# Altium PCB PCB1.PcbDoc
Units mm, origin at the board's own origin, x right, y up, seen from the top; angles counter-clockwise.
Board outline 64.01 x 64.26 mm, 2 copper layers (Top Layer, Bottom Layer); 22 components, 36 nets, 127 pads, 2 vias.
Unrouted connection lines stored in the file: 5.
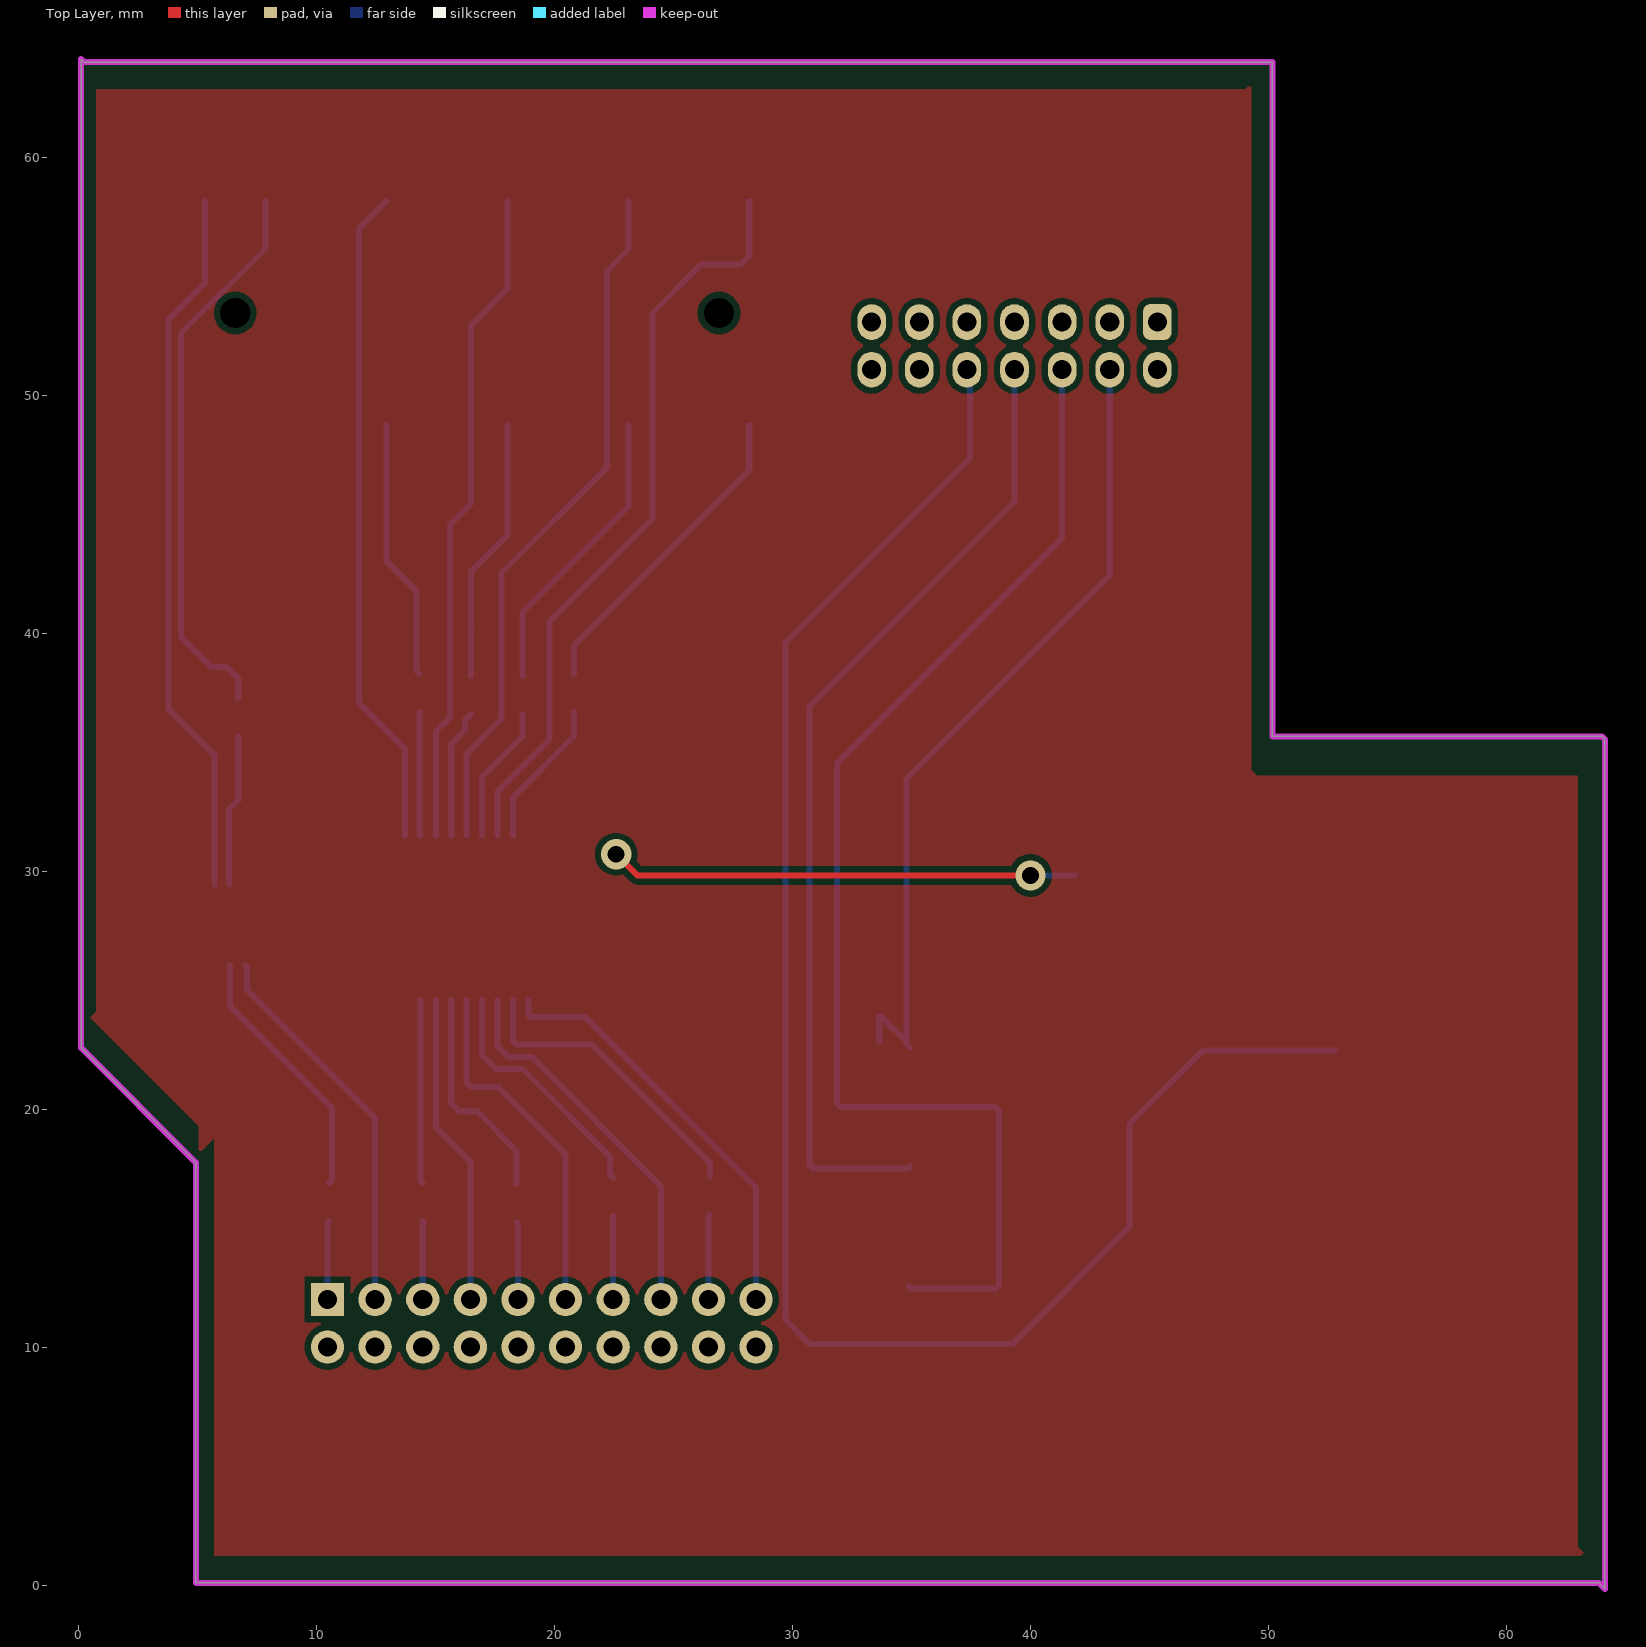
[diagram p0: Top Layer view]
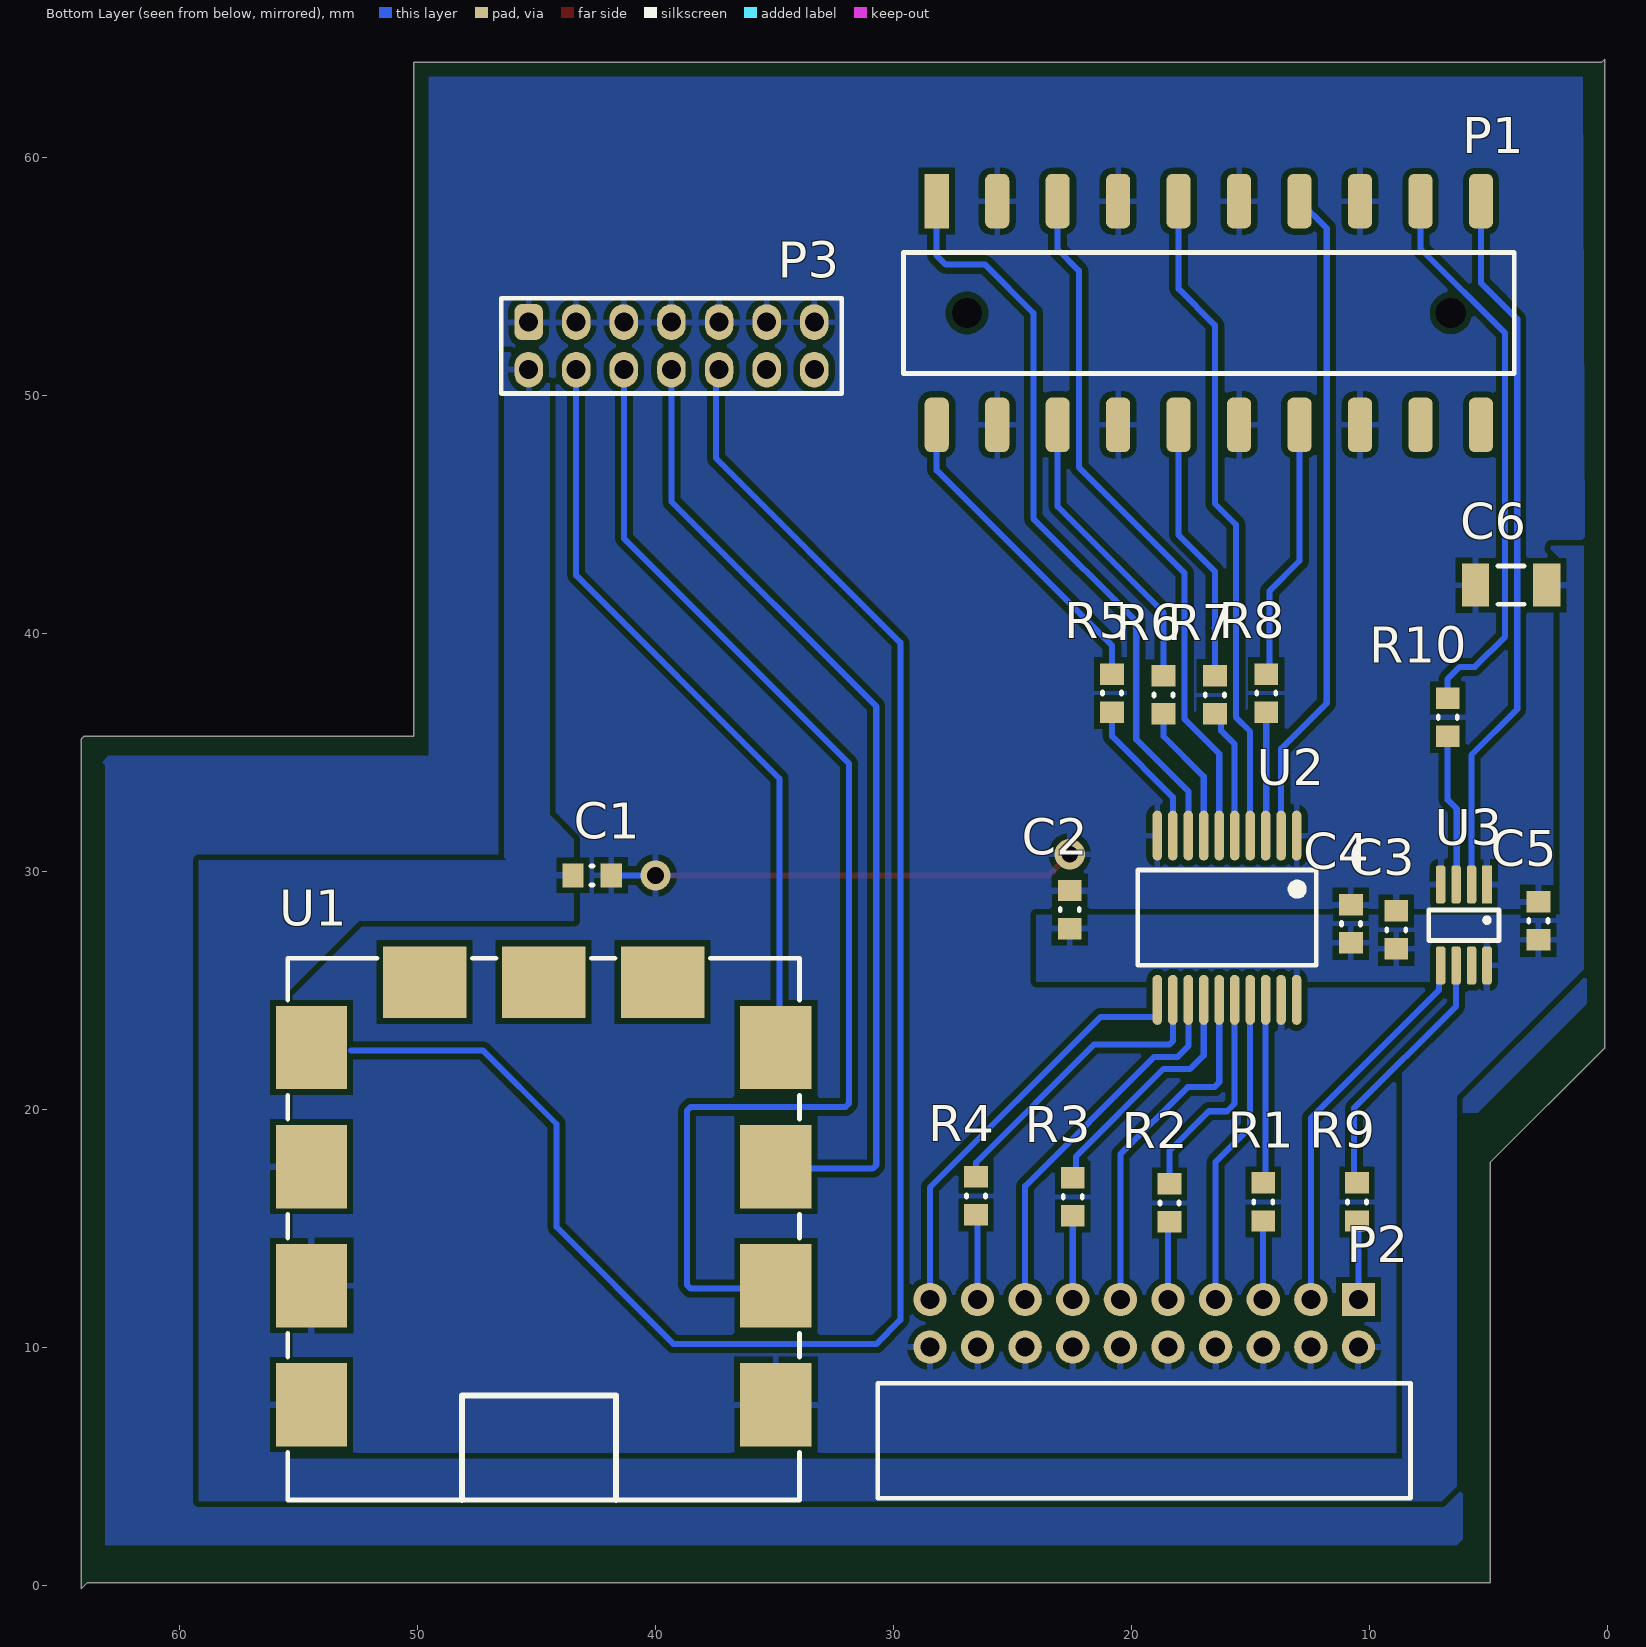
[diagram p1: Bottom Layer view, seen from below]

## Layer stack, top to bottom
Top Solder: solder mask 0.0102, Solder Resist, Dk 3.5
Top Layer: signal copper 0.0356
Dielectric 1: dielectric 0.32, FR-4, Dk 4.8
Bottom Layer: signal copper 0.0356
Bottom Solder: solder mask 0.0102, Solder Resist, Dk 3.5

## Board outline
4.953,0.127 4.953,17.78 0.127,22.606 0.127,64.135 0.254,64.008 50.165,64.008 50.165,35.687 64.008,35.687 64.135,35.56 64.135,-0.127 63.881,0.127

## Design rules (kind name [scope] priority, off if disabled: settings)
Clearance [All] p1: gap=0.254 ignorepadtopadclearanceinfootprint=FALSE except(0: Arc-Hole Track-Hole SMDPad-Hole THPad-Hole Via-Hole Fill-Hole Poly-Hole Region-Hole Text-Hole)
PolygonConnect [All] p1: connectstyle=Relief reliefconductorwidth=0.254 reliefentries=4 polygonreliefangle="90 Angle" airgapwidth=0.254
RoutingVias [All] p1: holewidth=0.711 width=1.27 viastyle="Through Hole" minholewidth=0.711 minwidth=1.27 maxholewidth=0.711 maxwidth=1.27
SolderMaskExpansion [All] p1: expansion=0.102 istentingtop=FALSE
Width [All] p1: maxlimit=0.254 minlimit=0.254 preferedwidth=0.254
30 further rules are at their usual default settings.

## Components (designator, comment, footprint, x,y, rotation, side; value= is the part's Value field where it differs from the comment)
C1 "Cap" CAPC0603(1608)100_N 42.672,29.845 r0 bottom value="100 nF"
C2 "Cap" CAPC0603(1608)100_N 22.606,28.41 r270 bottom value="1 nF"
C3 "Cap" CAPC0603(1608)100_N 8.89,27.559 r270 bottom value="100 nF"
C4 "Cap" CAPC0603(1608)100_N 10.795,27.813 r270 bottom value="1 nF"
C5 "Cap" CAPC0603(1608)100_N 2.921,27.94 r270 bottom value="100 nF"
C6 "Cap" CAPC1206(3216)100_N 4.064,42.037 r180 bottom value="10 uF"
P1 "SSM-110-x-DV-LC" SSM-110-X-DV-LC 28.194,58.166 r90 bottom
P2 "LTMM-110-02-x-D-RA" LTMM-110-02-X-D-RA 10.479,12.033 r270 bottom
P3 "PTF-107-xx-L-D" PTF-107-XX-L-D 45.336,53.088 r90 bottom locked
R1 "Res3" RESC0603(1608)_N 14.478,16.129 r270 bottom value=100R
R2 "Res3" RESC0603(1608)_N 18.415,16.091 r270 bottom value=100R
R3 "Res3" RESC0603(1608)_N 22.479,16.345 r270 bottom value=100R
R4 "Res3" RESC0603(1608)_N 26.543,16.383 r270 bottom value=100R
R5 "Res3" RESC0603(1608)_N 20.828,37.503 r90 bottom value=100R
R6 "Res3" RESC0603(1608)_N 18.669,37.427 r90 bottom value=100R
R7 "Res3" RESC0603(1608)_N 16.51,37.427 r90 bottom value=100R
R8 "Res3" RESC0603(1608)_N 14.351,37.503 r90 bottom value=100R
R9 "Res3" RESC0603(1608)_N 10.541,16.129 r270 bottom value=100R
R10 "Res3" RESC0603(1608)_N 6.731,36.487 r90 bottom value=100R
U1 "JTAG-SMT2" JTAG-SMT2 44.704,15.113 r0 bottom
U2 "SN74LVC244ADB" DB020_N 16.002,28.067 r270 bottom
U3 "SN74LVC2G241DCTR" DCT08_N 5.08,29.464 r270 bottom

## Footprints (in the part's own frame and the unit in brackets; to place one, negate y for a bottom-side part, rotate by r counter-clockwise, add the part's x,y. Pads: shape width x height; smd on the part's side, far side on the other; paste and mask are expansions set on the pad)
CAPC0603(1608)100_N [mm] "Chip Capacitor, Body 1.6x0.8mm, Height 1.0mm, IPC Medium Density"
  rect 0.9x1 smd: 1(-0.8,0) 2(0.8,0)
  silkscreen extent -0.05,-0.4 0.05,0.4, body extent -0.87,-0.48 0.88,0.47, height 1
CAPC1206(3216)100_N [mm] "Chip Capacitor, Body 3.2x1.6mm, Height 1mm, IPC Medium Density"
  rect 1.15x1.8 smd: 1(-1.5,0) 2(1.5,0)
  silkscreen extent -0.55,-0.8 0.55,0.8, body extent -1.7,-0.9 1.7,0.9, height 1
DB020_N [mm] "SOP, 20-Leads, Body 7.2x5.3mm, Pitch 0.65mm, IPC Medium Density"
  oval 2.1x0.4 smd: 1(-3.45,2.925) 2(-3.45,2.275) 3(-3.45,1.625) 4(-3.45,0.975) 5(-3.45,0.325) 6(-3.45,-0.325) 7(-3.45,-0.975) 8(-3.45,-1.625) 9(-3.45,-2.275) 10(-3.45,-2.925) 11(3.45,-2.925) 12(3.45,-2.275) 13(3.45,-1.625) 14(3.45,-0.975) 15(3.45,-0.325) 16(3.45,0.325) 17(3.45,0.975) 18(3.45,1.625) 19(3.45,2.275) 20(3.45,2.925)
  silkscreen extent -2,-3.75 2,3.75, body extent -2.7,-3.75 2.7,3.75, height 2
DCT08_N [mm]
  rect 1.6x0.4 smd: 1(0,0)
  rrect50% 1.6x0.4 smd: 2(0,-0.65) 3(0,-1.3) 4(0,-1.95) 5(3.4,-1.95) 6(3.4,-1.3) 7(3.4,-0.65) 8(3.4,0)
  silkscreen extent 1.07,-2.45 2.35,0.5
JTAG-SMT2 [mm]
  rect 3x3.5 smd: 1(-9.75,7.5) 2(-9.75,2.5) 3(-9.75,-2.5) 4(-9.75,-7.5) 8(9.75,-7.5) 9(9.75,-2.5) 10(9.75,2.5) 11(9.75,7.5)
  rect 3.5x3 smd: 5(-5,-10.25) 6(0,-10.25) 7(5,-10.25)
  silkscreen extent -10.75,-11.25 10.75,11.5
LTMM-110-02-X-D-RA [mm]
  rect 1.4x1.4 hole 0.8: 1(0,0)
  round 1.4 hole 0.8: 2(2,0) 3(0,-2) 4(2,-2) 5(0,-4) 6(2,-4) 7(0,-6) 8(2,-6) 9(0,-8) 10(2,-8) 11(0,-10) 12(2,-10) 13(0,-12) 14(2,-12) 15(0,-14) 16(2,-14) 17(0,-16) 18(2,-16) 19(0,-18) 20(2,-18)
  silkscreen extent 3.52,-20.19 8.35,2.19
PTF-107-XX-L-D [mm]
  rrect50% 1.5x1.2 hole 0.8: 1(0,0)
  oval 1.5x1.2 hole 0.8: 2(-2,0) 3(0,-2) 4(-2,-2) 5(0,-4) 6(-2,-4) 7(0,-6) 8(-2,-6) 9(0,-8) 10(-2,-8) 11(0,-10) 12(-2,-10) 13(0,-12) 14(-2,-12)
  silkscreen extent -3,-13.15 1,1.15
RESC0603(1608)_N [mm] "Chip Resistor, Body 1.6x0.8mm, IPC Medium Density"
  rect 0.9x1 smd: 1(-0.8,0) 2(0.8,0)
  silkscreen extent -0.05,-0.4 0.05,0.4, body extent -0.85,-0.47 0.85,0.47, height 0.6
SSM-110-X-DV-LC [mil]
  rect 90x40 smd: 1(0,0)
  rrect50% 90x40 smd: 2(-370,0) 3(0,-100) 4(-370,-100) 5(0,-200) 6(-370,-200) 7(0,-300) 8(-370,-300) 9(0,-400) 10(-370,-400) 11(0,-500) 12(-370,-500) 13(0,-600) 14(-370,-600) 15(0,-700) 16(-370,-700) 17(0,-800) 18(-370,-800) 19(0,-900) 20(-370,-900)
  round 0 hole 50 unplated: LC1(-185,-50) LC2(-185,-850)
  silkscreen extent -285,-955 -85,55

## Part data
C1 C2 C3 C4 C5 C6: "Capacitor", LatestRevisionDate=17-Jul-2002, LatestRevisionNote="Re-released for DXP Platform.", PackageDescription="Radial Cap, Thru-Hole; 2 Leads; 0.3 in Pin Spacing", PackageReference=RAD-0.3, Published=8-Jun-2000, Publisher="Altium Limited"
P1: "Samtec SSM-110-x-DV-LC", LatestRevisionDate=17-Jul-2002, LatestRevisionNote="Re-released for DXP Platform.", Publisher="Altium Limited"
P2: "Samtec LTMM-110-02-x-D-RA", LatestRevisionDate=17-Jul-2002, LatestRevisionNote="Re-released for DXP Platform.", Publisher="Altium Limited"
P3: "Samtec PTF-107-xx-L-D", LatestRevisionDate=17-Jul-2002, LatestRevisionNote="Re-released for DXP Platform.", Publisher="Altium Limited"
R1 R2 R3 R4 R5 R6 R7 R8 R9 R10: "Resistor", LatestRevisionDate=29-May-2009, LatestRevisionNote="IPC-7351 Footprint Added.", PackageDescription="Chip Resistor", PackageReference=J1-0603, Published=8-Jun-2000, Publisher="Altium Limited"
U1: library part JTAG_SMT2
U2: "Octal Buffer/Driver with 3-State Outputs", Code_IPC=SOP65P780-20, Code_JEDEC=MO-150-AE, ComponentLink1Description="Manufacturer Link", ComponentLink1URL=http://www.ti.com/, ComponentLink2Description=Datasheet, ComponentLink2URL=http://www-s.ti.com/sc/ds/sn74lvc244a.pdf, DatasheetVersion=Apr-1999, LatestRevisionDate=16-Oct-2006, LatestRevisionNote="IPC-7351 Footprint Added.", PackageDescription="20-Pin Plastic Small Outline Package 0.65 mm Pitch", PackageReference=DB020, PackageVersion=May-1999, Published=8-Jun-2000, Publisher="Altium Limited"
U3: "Quadruple Bus Buffer Gate with 3- State Outputs", Code_JEDEC=MO-092-AB, ComponentLink1Description="Manufacturer Link", ComponentLink1URL=http://www.ti.com/, ComponentLink2Description=Datasheet, ComponentLink2URL=http://www-s.ti.com/sc/ds/sn54abt125.pdf, DatasheetVersion=May-1997, LatestRevisionDate=06-Jun-2005, LatestRevisionNote="Stylized 3D Model Added.", PackageDescription="DFP; 14 Leads; Body 9.9 x 6.6 mm (LxW max); Pitch 1.27 mm", PackageReference=W014, PackageVersion=Jan-1995, Published=8-Jun-2000, Publisher="Altium Limited"

## Via types
v1: diameter 1.27, hole 0.711, Top Layer to Bottom Layer, 2 vias

## Nets (pads, with @x,y where several pads share a name; then routed paths per layer and width w, separated by ;. In a path a pad name is that pad's centre, name@x,y a point inside that pad or via, vN(x,y) a via of type N, cw(c..) or ccw(c..) an arc to the next point about the centre after c; other vN are vias at no path point)
GND: C1.1 C2.1 C3.1 C4.1 C5.1 C6.1 P1.3 P1.4 P1.7 P1.8 P1.11 P1.12 P1.15 P1.16 P2.2 P2.4 P2.6 P2.8 P2.10 P2.12 P2.14 P2.16 P2.18 P2.20 P3.1 P3.3 P3.5 P3.7 P3.9 P3.11 P3.13 U1.1 U1.10 U2.1 U2.10 U2.19 U3.1 U3.4 U3.7 | length 19.6
  Top Layer w0.254: v1(22.606,30.734) 23.495,29.845 v1(40.005,29.845)
  Bottom Layer w0.254: v1(40.005,29.845) C1.1
IN0: P2.3 U3.5 | length 16.3
  Bottom Layer w0.254: U3.5 7.103,25.991 7.103,25.028 12.479,19.652 P2.3
IN1: P2.7 U2.17 | length 13.2
  Bottom Layer w0.254: U2.17 15.027,19.263 16.479,17.811 P2.7
IN2: P2.11 U2.15 | length 15
  Bottom Layer w0.254: U2.15 16.327,21.16 16.532,20.955 17.653,20.955 20.479,18.129 P2.11
IN3: P2.15 U2.13 | length 16
  Bottom Layer w0.254: U2.13 17.627,22.676 18.078,22.225 19.05,22.225 24.479,16.796 P2.15
IN4: P2.19 U2.11 | length 17.9
  Bottom Layer w0.254: U2.11 18.927,23.961 18.994,23.894 21.321,23.894 28.479,16.736 P2.19
MICTOR01: P1.19 U3.2 | length 30.1
  Bottom Layer w0.254: P1.19 5.334,54.737 3.81,53.213 3.81,36.83 5.73,34.91 U3.2
MICTOR02: P1.17 R10.2 | length 23.7
  Bottom Layer w0.254: R10.2 6.731,38.1 6.223,38.608 5.588,38.608 4.318,39.878 4.318,52.618 7.874,56.174 P1.17
MICTOR03: P1.13 U2.2 | length 27.9
  Bottom Layer w0.254: P1.13 11.811,57.023 11.811,37.081 13.727,35.165 U2.2@13.727,32.131 ; U2.2@13.716,32.131 13.727,32.12 U2.2
MICTOR04: P1.9 U2.4 | length 27.9
  Bottom Layer w0.254: U2.4 15.027,35.89 15.629,36.492 15.629,44.585 16.51,45.466 16.51,52.959 18.034,54.483 P1.9
MICTOR05: P1.5 U2.6 | length 29.5
  Bottom Layer w0.254: U2.6 16.327,34.955 17.788,36.416 17.788,42.553 22.225,46.99 22.225,55.245 23.114,56.134 P1.5
MICTOR06: P1.1 U2.8 | length 32
  Bottom Layer w0.254: U2.8 17.627,33.375 19.812,35.56 19.812,40.513 24.13,44.831 24.13,53.467 26.162,55.499 27.813,55.499 28.194,55.88 P1.1
MICTOR07: P1.2 R5.2 | length 13.5
  Bottom Layer w0.254: R5.2 20.828,39.497 28.194,46.863 P1.2
MICTOR08: P1.6 R6.2 | length 12.4
  Bottom Layer w0.254: R6.2 18.669,40.894 23.114,45.339 P1.6
MICTOR09: P1.14 R8.2 | length 11
  Bottom Layer w0.254: P1.14 12.954,43.053 14.224,41.783 14.224,38.43 R8.2
MICTOR10: P1.10 R7.2 | length 11.2
  Bottom Layer w0.254: R7.2 16.51,40.215 16.532,40.237 16.51,40.259 16.51,42.613 18.034,44.137 P1.10
NetR1_1: R1.1 U2.18 | length 7.7
  Bottom Layer w0.254: U2.18 14.377,17.03 R1.1
NetR2_1: R2.1 U2.16 | length 9.3
  Bottom Layer w0.254: U2.16 15.677,20.264 16.002,19.939 16.764,19.939 18.415,18.288 R2.1
NetR3_1: R3.1 U2.14 | length 10.4
  Bottom Layer w0.254: U2.14 16.977,22.288 17.548,21.717 18.669,21.717 22.352,18.034 22.352,17.272 R3.1
NetR4_1: R4.1 U2.12 | length 12.7
  Bottom Layer w0.254: U2.12 18.277,22.882 18.426,22.733 21.59,22.733 26.543,17.78 R4.1
NetR5_1: R5.1 U2.9 | length 6.2
  Bottom Layer w0.254: U2.9 18.277,33.136 20.828,35.687 R5.1
NetR6_1: R6.1 U2.7 | length 5.8
  Bottom Layer w0.254: U2.7 16.977,33.995 18.669,35.687 R6.1
NetR7_1: R7.1 U2.5 | length 5.5
  Bottom Layer w0.254: U2.5 15.677,35.362 16.256,35.941 16.256,36.373 R7.1
NetR8_1: R8.1 U2.3 | length 5.2
  Bottom Layer w0.254: R8.1 14.351,31.543 U2.3
NetR9_1: R9.1 U3.6 | length 11
  Bottom Layer w0.254: U3.6 6.38,24.354 10.668,20.066 10.668,17.056 R9.1
NetR10_1: R10.1 U3.3 | length 6.4
  Bottom Layer w0.254: U3.3 6.35,29.494 6.35,32.639 6.731,33.02 R10.1
OUT0: P2.1 R9.2 | length 3.3
  Bottom Layer w0.254: P2.1 10.479,15.267 R9.2
OUT1: P2.5 R1.2 | length 3.3
  Bottom Layer w0.254: R1.2 R1.2 P2.5
OUT2: P2.9 R2.2 | length 3.3
  Bottom Layer w0.254: R2.2 18.479,15.227 P2.9
OUT3: P2.13 R3.2 | length 3.5
  Bottom Layer w0.254: P2.13 R3.2
OUT4: P2.17 R4.2 | length 3.6
  Bottom Layer w0.254: P2.17 26.479,15.519 R4.2
TCK: P3.6 U1.2 | length 52.9
  Bottom Layer w0.254: U1.2@34.913,12.598 34.954,12.486 38.532,12.486 38.68,12.635 38.68,19.976 38.532,20.125 32.024,20.125 31.875,20.274 31.875,34.542 41.336,44.003 P3.6
TDI: P3.10 U1.8 | length 74.3
  Bottom Layer w0.254: P3.10 37.465,50.959 37.465,47.371 29.718,39.624 29.718,11.176 30.734,10.16 39.243,10.16 44.163,15.08 44.163,19.405 47.245,22.486 52.803,22.486
TDO: P3.8 U1.3 | length 41.3
  Bottom Layer w0.254: U1.3 34.867,17.526 30.883,17.526 30.734,17.675 30.734,36.949 39.336,45.551 P3.8
TMS: P3.4 U1.4 | length 34.6
  Bottom Layer w0.254: U1.4@33.655,22.86 33.655,23.912 33.746,23.912 34.798,22.86 34.798,33.909 43.336,42.447 P3.4 ; U1.4@34.798,22.769 U1.4
VCC: C1.2 C2.2 C3.2 C4.2 C5.2 C6.2 P3.2 U1.9 U1.11 U2.20 U3.8
pads on no net: P1.18 P1.20 P1.LC1 P1.LC2 P3.12 P3.14 U1.5 U1.6 U1.7

## Polygon pours and split planes (outlines as drawn)
GND on Bottom Layer "GND_L02_P004" (solid, pour order 4): 1.063,63.396 49.489,63.396 49.53,63.436 49.53,34.861 62.992,34.861 63.246,34.608 63.119,34.48 63.119,1.714 6.35,1.714 6.096,1.968 6.096,19.875 5.461,19.875 0.889,24.447
VCC on Bottom Layer "VCC_L02_P003" (solid, pour order 3): 1.524,25.4 1.016,25.908 1.016,43.688 2.54,43.688 2.032,43.18 2.032,25.146
VCC on Bottom Layer "VCC_L02_P000" (solid, pour order 0): 58.928,5.334 59.182,3.556 6.985,3.556 6.35,4.191 6.35,20.574 1.524,25.4 1.524,27.94 1.778,28.194 24.003,28.194 24.003,25.4 23.988,25.385 5.73,25.385 8.636,22.479 8.636,5.334
VCC on Bottom Layer "VCC_L02_P001" (solid, pour order 1): 44.45,51.816 46.355,51.816 46.355,30.607 46.228,30.48 59.182,30.48 59.182,3.556 55.499,3.556 55.499,24.892 52.451,27.94 43.434,27.94 43.434,31.369 44.45,32.385 44.45,50.165
no net on Top Layer "NONET_L01_P005" (solid, pour order 5): 49.149,62.992 49.022,62.865 0.762,62.865 0.762,24.13 0.508,23.876 5.08,19.304 5.08,18.288 5.207,18.288 5.715,18.796 5.715,1.27 63.119,1.27 63.246,1.397 62.992,1.651 62.992,34.036 49.53,34.036 49.276,34.29 49.276,63.373

## Keep-outs
Top Layer:
  lines w0.254: 0.127,22.606 0.127,64.135 0.254,64.008 50.165,64.008 50.165,55.626 50.165,35.687 64.008,35.687 64.135,35.56 64.135,-0.127 63.881,0.127 4.953,0.127 4.953,17.78 0.127,22.606